# EAGLE board Stepper_2_0 (EAGLE 8.3.2)
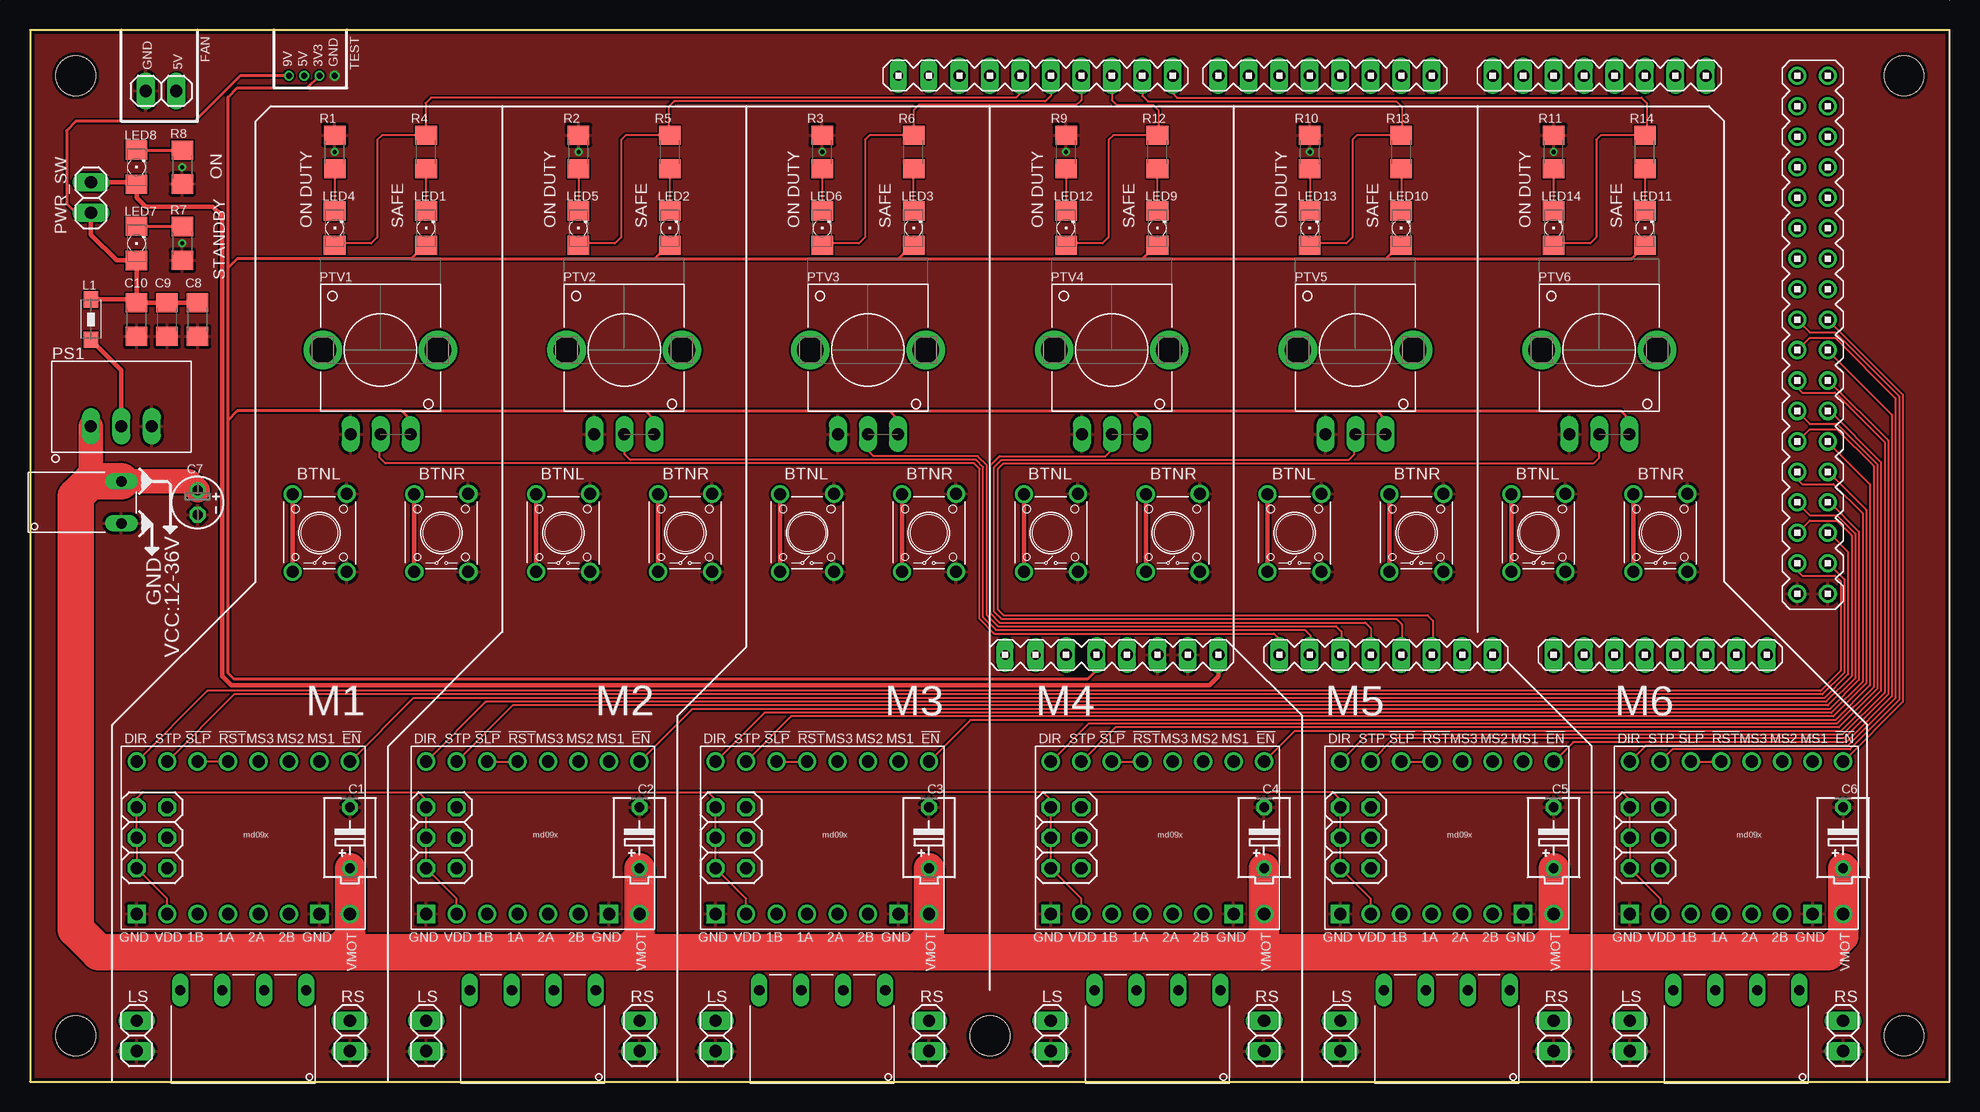
[diagram p0: board, top side]
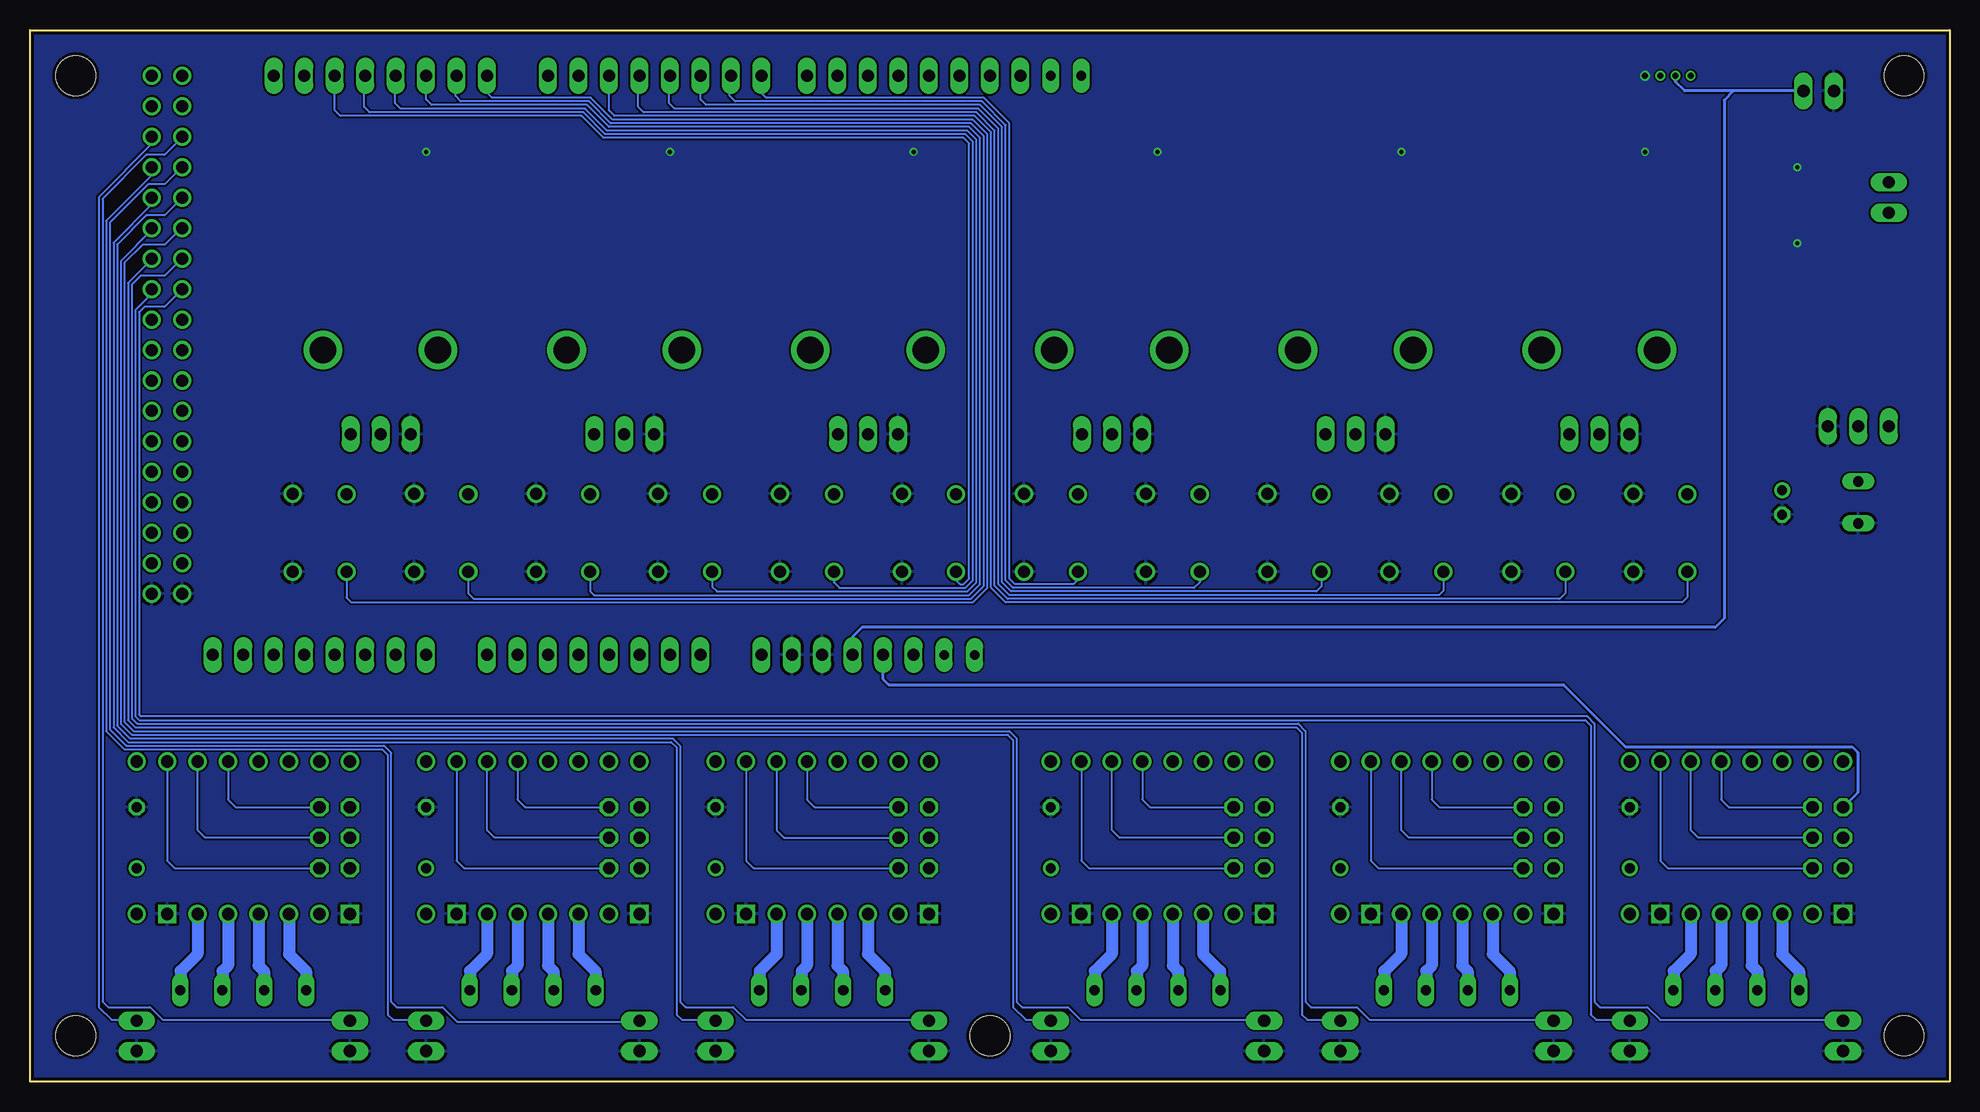
[diagram p1: board, bottom side, seen from below]

Size 160.02 x 87.63 mm. Coordinates in mm from the lower left corner, seen from the top.
Outline: 160.02,87.63 0,87.63 0,0 160.02,0 160.02,87.63
Copper layers (1*16): Top 0.035mm / dielectric 1.5mm / Bottom 0.035mm
Design rules "SeeedStudio_2layer_DRU_no_angle_20140221": minimum track width 6mil, minimum drill 12mil, track to track 6mil, track to pad 6mil, pad to pad 6mil, via to via 6mil, smd to smd 0mil, copper to edge 10mil, drill to drill 10mil, minimum pad ring 10mil, minimum via ring 6mil, stop-mask expansion 2mil, vias tented up to drill 100mil, thermal gap 10mil

## Footprints (pad centres in the part's own frame; a part is rotated, then mirrored left to right if it is on the bottom)
ETR2 = drill 0.813: + -2.54,0 | drill 0.813 octagon: - 2.54,0
E2-4 = drill 0.813 pad 1.27: + -1.016,0 | drill 0.813 pad 1.27 octagon: - 1.016,0
1206 = smd 1.6 x 1.8: 1 -1.4,0; 2 1.4,0
DUE(NOSPI) = drill 1 long: 2 -16.51,30.48; 3 -19.05,30.48; 3V3 -39.37,-17.78; 4 -21.59,30.48; 5 -24.13,30.48; 5V -36.83,-17.78; 6 -26.67,30.48; 7 -29.21,30.48; 8 -33.02,30.48; 9 -35.56,30.48; 10 -38.1,30.48; 11 -40.64,30.48; 12 -43.18,30.48; 13 -45.72,30.48; A0 -24.13,-17.78; A1 -21.59,-17.78; A2 -19.05,-17.78; A3 -16.51,-17.78; A4 -13.97,-17.78; A5 -11.43,-17.78; A6 -8.89,-17.78; A7 -6.35,-17.78; A8 -1.27,-17.78; A9 1.27,-17.78; A10 3.81,-17.78; A11 6.35,-17.78; AREF -50.8,30.48; CANRX 13.97,-17.78; CANTX 16.51,-17.78; DAC0 8.89,-17.78; DAC1 11.43,-17.78; GND1 -48.26,30.48; GND_1 -34.29,-17.78; GND_2 -31.75,-17.78; RESET -41.91,-17.78; RX0 -11.43,30.48; RX1 6.35,30.48; RX2 1.27,30.48; RX3 -3.81,30.48; SCL 11.43,30.48; SDA 8.89,30.48; TX0 -13.97,30.48; TX1 3.81,30.48; TX2 -1.27,30.48; TX3 -6.35,30.48; VIN -29.21,-17.78 | drill 1: 5V_A 19.05,30.48; 5V_B 21.59,30.48; 22 19.05,27.94; 23 21.59,27.94; 24 19.05,25.4; 25 21.59,25.4; 26 19.05,22.86; 27 21.59,22.86; 28 19.05,20.32; 29 21.59,20.32; 30 19.05,17.78; 31 21.59,17.78; 32 19.05,15.24; 33 21.59,15.24; 34 19.05,12.7; 35 21.59,12.7; 36 19.05,10.16; 37 21.59,10.16; 38 19.05,7.62; 39 21.59,7.62; 40 19.05,5.08; 41 21.59,5.08; 42 19.05,2.54; 43 21.59,2.54; 44 19.05,0; 45 21.59,0; 46 19.05,-2.54; 47 21.59,-2.54; 48 19.05,-5.08; 49 21.59,-5.08; 50 19.05,-7.62; 51 21.59,-7.62; 52 19.05,-10.16; 53 21.59,-10.16; GND_A 19.05,-12.7; GND_B 21.59,-12.7 | drill 0.8 pad 1.422 long: IOREF -44.45,-17.78; NC -46.99,-17.78; SCL1 -55.88,30.48; SDA1 -53.34,30.48
STAND-OFF = hole 3.302: 0,0
2X03 = drill 1.016 octagon: 1 -2.54,-1.27; 2 -2.54,1.27; 3 0,-1.27; 4 0,1.27; 5 2.54,-1.27; 6 2.54,1.27
1X02 = drill 1.016 long: 1 -1.27,0; 2 1.27,0
1206' = smd 1.35 x 1.2: 1 -1.675,0; 2 1.675,0
1206'' = smd 1.6 x 1.803: A -1.422,0; C 1.422,0
MD09X = drill 1.016: 1A 6.35,-1.27; 1B 6.35,-3.81; 2A 6.35,1.27; 2B 6.35,3.81; !EN -6.35,8.89; !RST -6.35,-1.27; !SLP -6.35,-3.81; DIR -6.35,-8.89; MS1 -6.35,6.35; MS2 -6.35,3.81; MS3 -6.35,1.27; STEP -6.35,-6.35; VDD 6.35,-6.35; VMOT 6.35,8.89 | drill 1.016 square: GND1 6.35,-8.89; GND2 6.35,6.35
VX78-500 = drill 1 long: P$1 -2.54,0; P$2 0,0; P$3 2.54,0
PTV09A-4 = drill 1 long: P$1 -2.5,-7; P$2 0,-7; P$3 2.5,-7 | drill 2.2: PA1 -4.8,0; PA2 4.8,0
BTN_SPST_6MM = drill 1: P$1 -3.25,2.25; P$2 3.23,2.25; P$3 -3.25,-2.25; P$4 3.25,-2.25
TB_HEAD_3.5MM_01X04 = drill 0.85 long: P$1 -5.25,0; P$2 -1.75,0; P$3 1.75,0; P$4 5.25,0
TB_HEAD_3.5MM_01X02 = drill 0.85 long: P$1 -1.75,0; P$2 1.75,0

## Placement (x,y rotation side)
C1  100u  [ETR2]  26.67,20.32 90 top
C2  100u  [ETR2]  50.8,20.32 90 top
C3  100u  [ETR2]  74.93,20.32 90 top
C4  100u  [ETR2]  102.87,20.32 90 top
C5  100u  [ETR2]  127,20.32 90 top
C6  100u  [ETR2]  151.13,20.32 90 top
C7  10u  [E2-4]  13.97,48.26 270 top
C8  10u  [1206]  13.97,63.5 90 top
C9  4.7u  [1206]  11.43,63.5 90 top
C10  0.1u  [1206]  8.89,63.5 90 top
DUE1  DUE(NOSPI)  [DUE(NOSPI)]  128.27,53.34 0 top
H1  STAND-OFF  [STAND-OFF]  80.01,3.81 180 top
H2  STAND-OFF  [STAND-OFF]  156.21,83.82 180 top
H3  STAND-OFF  [STAND-OFF]  156.21,3.81 180 top
H4  STAND-OFF  [STAND-OFF]  3.81,3.81 180 top
H5  STAND-OFF  [STAND-OFF]  3.81,83.82 180 top
JP1  [2X03]  10.16,20.32 270 top
JP2  [2X03]  34.29,20.32 270 top
JP3  [2X03]  58.42,20.32 270 top
JP4  [1X02]  8.89,3.81 270 top
JP5  [1X02]  26.67,3.81 270 top
JP6  [1X02]  33.02,3.81 270 top
JP7  [1X02]  50.8,3.81 270 top
JP8  [1X02]  57.15,3.81 270 top
JP9  [1X02]  74.93,3.81 270 top
JP10  [2X03]  86.36,20.32 270 top
JP11  [2X03]  110.49,20.32 270 top
JP12  [2X03]  134.62,20.32 270 top
JP13  [1X02]  85.09,3.81 270 top
JP14  [1X02]  102.87,3.81 270 top
JP15  [1X02]  109.22,3.81 270 top
JP16  [1X02]  127,3.81 270 top
JP17  [1X02]  133.35,3.81 270 top
JP18  [1X02]  151.13,3.81 270 top
JP19  [1X02]  5.08,73.66 90 top
JP20  [1X02]  10.92,82.55 0 top
L1  [1206']  5.08,63.5 90 top
LED1  GREEN  [1206'']  33.02,71.12 90 top
LED2  GREEN  [1206'']  53.34,71.12 90 top
LED3  GREEN  [1206'']  73.66,71.12 90 top
LED4  RED  [1206'']  25.4,71.12 90 top
LED5  RED  [1206'']  45.72,71.12 90 top
LED6  RED  [1206'']  66.04,71.12 90 top
LED7  GREEN  [1206'']  8.89,69.85 90 top
LED8  RED  [1206'']  8.89,76.2 90 top
LED9  GREEN  [1206'']  93.98,71.12 90 top
LED10  GREEN  [1206'']  114.3,71.12 90 top
LED11  GREEN  [1206'']  134.62,71.12 90 top
LED12  RED  [1206'']  86.36,71.12 90 top
LED13  RED  [1206'']  106.68,71.12 90 top
LED14  RED  [1206'']  127,71.12 90 top
PL1  A4988X  [MD09X]  17.78,20.32 270 top
PL2  A4988X  [MD09X]  41.91,20.32 270 top
PL3  A4988X  [MD09X]  66.04,20.32 270 top
PL4  A4988X  [MD09X]  93.98,20.32 270 top
PL5  A4988X  [MD09X]  118.11,20.32 270 top
PL6  A4988X  [MD09X]  142.24,20.32 270 top
PS1  VX78-500  [VX78-500]  7.62,54.61 0 top
PTV1  10K  [PTV09A-4]  29.21,60.96 0 top
PTV2  10K  [PTV09A-4]  49.53,60.96 0 top
PTV3  10K  [PTV09A-4]  69.85,60.96 0 top
PTV4  10K  [PTV09A-4]  90.17,60.96 0 top
PTV5  10K  [PTV09A-4]  110.49,60.96 0 top
PTV6  10K  [PTV09A-4]  130.81,60.96 0 top
R1  150  [1206]  25.4,77.47 90 top
R2  150  [1206]  45.72,77.47 90 top
R3  150  [1206]  66.04,77.47 90 top
R4  150  [1206]  33.02,77.47 90 top
R5  150  [1206]  53.34,77.47 90 top
R6  150  [1206]  73.66,77.47 90 top
R7  1K  [1206]  12.7,69.85 270 top
R8  1K  [1206]  12.7,76.2 270 top
R9  150  [1206]  86.36,77.47 90 top
R10  150  [1206]  106.68,77.47 90 top
R11  150  [1206]  127,77.47 90 top
R12  150  [1206]  93.98,77.47 90 top
R13  150  [1206]  114.3,77.47 90 top
R14  150  [1206]  134.62,77.47 90 top
S1  BTN_SPST_6MM  [BTN_SPST_6MM]  24.13,45.72 90 top
S2  BTN_SPST_6MM  [BTN_SPST_6MM]  34.29,45.72 90 top
S3  BTN_SPST_6MM  [BTN_SPST_6MM]  44.45,45.72 90 top
S4  BTN_SPST_6MM  [BTN_SPST_6MM]  54.61,45.72 90 top
S5  BTN_SPST_6MM  [BTN_SPST_6MM]  64.77,45.72 90 top
S6  BTN_SPST_6MM  [BTN_SPST_6MM]  74.93,45.72 90 top
S7  BTN_SPST_6MM  [BTN_SPST_6MM]  85.09,45.72 90 top
S8  BTN_SPST_6MM  [BTN_SPST_6MM]  95.25,45.72 90 top
S9  BTN_SPST_6MM  [BTN_SPST_6MM]  105.41,45.72 90 top
S10  BTN_SPST_6MM  [BTN_SPST_6MM]  115.57,45.72 90 top
S11  BTN_SPST_6MM  [BTN_SPST_6MM]  125.73,45.72 90 top
S12  BTN_SPST_6MM  [BTN_SPST_6MM]  135.89,45.72 90 top
TB1  TB_HEAD_3.5MM_01X04  [TB_HEAD_3.5MM_01X04]  17.78,7.62 180 top
TB2  TB_HEAD_3.5MM_01X04  [TB_HEAD_3.5MM_01X04]  41.91,7.62 180 top
TB3  TB_HEAD_3.5MM_01X04  [TB_HEAD_3.5MM_01X04]  66.04,7.62 180 top
TB4  TB_HEAD_3.5MM_01X04  [TB_HEAD_3.5MM_01X04]  93.98,7.62 180 top
TB5  TB_HEAD_3.5MM_01X04  [TB_HEAD_3.5MM_01X04]  118.11,7.62 180 top
TB6  TB_HEAD_3.5MM_01X04  [TB_HEAD_3.5MM_01X04]  142.24,7.62 180 top
TB7  TB_HEAD_3.5MM_01X02  [TB_HEAD_3.5MM_01X02]  7.62,48.26 90 top

## Library data of the parts
C1-C7 = rcl
C8-C10 = SparkFun-Passives
DUE1 = JoshParts
H1-H5 = SparkFun-Electromechanical
JP1-JP20 = pinhead
L1 = WE-CBF; MPN: 742792118; OC_FARNELL: 1800374; OC_NEWARK: 78R5648; PACKAGE: IND-1206; SUPPLIER: Wuerth Elektronik
LED1-LED14 = adafruit
PL1-PL6 PS1 PTV1-PTV6 S1-S12 TB1-TB7 = Steppers
R1-R14 = SparkFun-Resistors

## Nets
3V3: DUE1.3V3 JP1.1 JP1.3 JP1.5 JP2.1 JP2.3 JP2.5 JP3.1 JP3.3 JP3.5 JP10.1 JP10.3 JP10.5 JP11.1 JP11.3 JP11.5 JP12.1 JP12.3 JP12.5 LED1.A LED2.A LED3.A LED9.A LED10.A LED11.A PL1.VDD PL2.VDD PL3.VDD PL4.VDD PL5.VDD PL6.VDD PTV1.P$3 PTV2.P$3 PTV3.P$3 PTV4.P$3 PTV5.P$3 PTV6.P$3
5V: DUE1.5V JP20.2
9V: C8.2 C9.2 C10.2 JP19.1 L1.2 LED7.A
GND: C1.- C2.- C3.- C4.- C5.- C6.- C7.- C8.1 C9.1 C10.1 DUE1.GND_1 DUE1.GND_2 DUE1.GND_A DUE1.GND_B JP4.2 JP5.2 JP6.2 JP7.2 JP8.2 JP9.2 JP13.2 JP14.2 JP15.2 JP16.2 JP17.2 JP18.2 JP20.1 PL1.GND1 PL1.GND2 PL2.GND1 PL2.GND2 PL3.GND1 PL3.GND2 PL4.GND1 PL4.GND2 PL5.GND1 PL5.GND2 PL6.GND1 PL6.GND2 PS1.P$3 PTV1.P$1 PTV2.P$1 PTV3.P$1 PTV4.P$1 PTV5.P$1 PTV6.P$1 R1.2 R2.2 R3.2 R7.2 R8.2 R9.2 R10.2 R11.2 S1.P$3 S1.P$4 S2.P$3 S2.P$4 S3.P$3 S3.P$4 S4.P$3 S4.P$4 S5.P$3 S5.P$4 S6.P$3 S6.P$4 S7.P$3 S7.P$4 S8.P$3 S8.P$4 S9.P$3 S9.P$4 S10.P$3 S10.P$4 S11.P$3 S11.P$4 S12.P$3 S12.P$4 TB7.P$1
M1_BTNL: DUE1.2 S1.P$1 S1.P$2
M1_BTNR: DUE1.3 S2.P$1 S2.P$2
M1_DIR: DUE1.52 PL1.DIR
M1_EN: DUE1.51 PL1.!EN
M1_LED: DUE1.13 LED4.A R4.2
M1_MVEL: DUE1.A0 PTV1.P$2
M1_SL: DUE1.34 JP4.1
M1_SR: DUE1.35 JP5.1
M1_STEP: DUE1.53 PL1.STEP
M2_BTNL: DUE1.4 S3.P$1 S3.P$2
M2_BTNR: DUE1.5 S4.P$1 S4.P$2
M2_DIR: DUE1.50 PL2.DIR
M2_EN: DUE1.49 PL2.!EN
M2_LED: DUE1.12 LED5.A R5.2
M2_MVEL: DUE1.A1 PTV2.P$2
M2_SL: DUE1.32 JP6.1
M2_SR: DUE1.33 JP7.1
M2_STEP: DUE1.48 PL2.STEP
M3_BTNL: DUE1.6 S5.P$1 S5.P$2
M3_BTNR: DUE1.7 S6.P$1 S6.P$2
M3_DIR: DUE1.46 PL3.DIR
M3_EN: DUE1.45 PL3.!EN
M3_LED: DUE1.11 LED6.A R6.2
M3_MVEL: DUE1.A2 PTV3.P$2
M3_SL: DUE1.30 JP8.1
M3_SR: DUE1.31 JP9.1
M3_STEP: DUE1.47 PL3.STEP
M4_BTNL: DUE1.RX1 S7.P$1 S7.P$2
M4_BTNR: DUE1.TX1 S8.P$1 S8.P$2
M4_DIR: DUE1.44 PL4.DIR
M4_EN: DUE1.43 PL4.!EN
M4_LED: DUE1.10 LED12.A R12.2
M4_MVEL: DUE1.A3 PTV4.P$2
M4_SL: DUE1.28 JP13.1
M4_SR: DUE1.29 JP14.1
M4_STEP: DUE1.42 PL4.STEP
M5_BTNL: DUE1.RX2 S9.P$1 S9.P$2
M5_BTNR: DUE1.TX2 S10.P$1 S10.P$2
M5_DIR: DUE1.40 PL5.DIR
M5_EN: DUE1.39 PL5.!EN
M5_LED: DUE1.9 LED13.A R13.2
M5_MVEL: DUE1.A4 PTV5.P$2
M5_SL: DUE1.26 JP15.1
M5_SR: DUE1.27 JP16.1
M5_STEP: DUE1.41 PL5.STEP
M6_BTNL: DUE1.RX3 S11.P$1 S11.P$2
M6_BTNR: DUE1.TX3 S12.P$1 S12.P$2
M6_DIR: DUE1.38 PL6.DIR
M6_EN: DUE1.37 PL6.!EN
M6_LED: DUE1.8 LED14.A R14.2
M6_MVEL: DUE1.A5 PTV6.P$2
M6_SL: DUE1.24 JP17.1
M6_SR: DUE1.25 JP18.1
M6_STEP: DUE1.36 PL6.STEP
N$1: PL2.1B TB2.P$4
N$2: PL2.1A TB2.P$3
N$3: PL2.2A TB2.P$2
N$4: PL2.2B TB2.P$1
N$5: PL2.!RST PL2.!SLP
N$6: JP2.2 PL2.MS3
N$7: JP2.4 PL2.MS2
N$8: JP2.6 PL2.MS1
N$9: LED4.C R1.1
N$10: LED5.C R2.1
N$11: LED1.C R4.1
N$13: LED2.C R5.1
N$15: PL3.1B TB3.P$4
N$16: PL3.1A TB3.P$3
N$17: PL3.2A TB3.P$2
N$18: PL3.2B TB3.P$1
N$19: PL3.!RST PL3.!SLP
N$20: JP3.2 PL3.MS3
N$21: JP3.4 PL3.MS2
N$22: JP3.6 PL3.MS1
N$23: LED6.C R3.1
N$24: LED3.C R6.1
N$26: PL4.1B TB4.P$4
N$27: PL4.1A TB4.P$3
N$28: PL4.2A TB4.P$2
N$29: PL4.2B TB4.P$1
N$30: PL4.!RST PL4.!SLP
N$31: JP10.2 PL4.MS3
N$32: JP10.4 PL4.MS2
N$33: JP10.6 PL4.MS1
N$34: LED12.C R9.1
N$35: LED9.C R12.1
N$37: PL5.1B TB5.P$4
N$38: PL5.1A TB5.P$3
N$39: PL5.2A TB5.P$2
N$40: PL5.2B TB5.P$1
N$41: PL5.!RST PL5.!SLP
N$42: JP11.2 PL5.MS3
N$43: JP11.4 PL5.MS2
N$44: JP11.6 PL5.MS1
N$45: LED13.C R10.1
N$46: LED10.C R13.1
N$48: PL6.1B TB6.P$4
N$49: PL6.1A TB6.P$3
N$50: PL6.2A TB6.P$2
N$51: PL6.2B TB6.P$1
N$52: PL6.!RST PL6.!SLP
N$53: JP12.6 PL6.MS1
N$54: JP12.4 PL6.MS2
N$55: JP12.2 PL6.MS3
N$56: LED14.C R11.1
N$57: PL1.1B TB1.P$4
N$58: PL1.1A TB1.P$3
N$59: PL1.2A TB1.P$2
N$60: PL1.2B TB1.P$1
N$61: LED11.C R14.1
N$62: PL1.!RST PL1.!SLP
N$64: JP1.2 PL1.MS3
N$65: JP1.4 PL1.MS2
N$66: JP1.6 PL1.MS1
N$67: L1.1 PS1.P$2
N$68: LED7.C R7.1
N$71: LED8.C R8.1
VCC: C1.+ C2.+ C3.+ C4.+ C5.+ C6.+ C7.+ PL1.VMOT PL2.VMOT PL3.VMOT PL4.VMOT PL5.VMOT PL6.VMOT PS1.P$1 TB7.P$2
VIN: DUE1.VIN JP19.2 LED8.A

## Tracks (layer width: path | path; a pad name or v marks a point on that pad's centre or on a via)
3V3  (via drill 0.5)
  Top 0.152: PL1.VDD 11.43,15.24 JP1.5 JP1.3 JP1.1 8.89,23.62 9.4,24.13 32.38,24.13 | PL6.VDD 135.89,15.24 JP12.5 JP12.3 JP12.1 133.35,23.5 132.72,24.13 108.58,24.13 | PL5.VDD 111.76,15.24 JP11.5 JP11.3 JP11.1 109.22,23.5 108.58,24.13 | PL4.VDD 87.63,15.24 JP10.5 JP10.3 JP10.1 85.09,23.5 84.45,24.13 | PL3.VDD 59.69,15.24 JP3.5 JP3.3 JP3.1 57.15,23.5 56.52,24.13 | PL2.VDD 35.56,15.24 JP2.5 JP2.3 JP2.1 33.02,23.5 32.38,24.13 | 32.38,24.13 56.52,24.13 | 84.45,24.13 56.52,24.13 | 108.58,24.13 84.45,24.13
  Top 0.254: DUE1.3V3 88.9,34.29 88.14,33.53 17.02,33.53 16.51,34.04 16.51,55.12 | 16.51,55.12 17.27,55.88 30.99,55.88 | 91.95,55.88 112.27,55.88 | 71.63,55.88 91.95,55.88 | 51.31,55.88 71.63,55.88 | 30.99,55.88 51.31,55.88 | 112.27,55.88 132.59,55.88 133.35,55.12 133.35,54 PTV6.P$3 | PTV5.P$3 112.99,55.16 112.27,55.88 | PTV4.P$3 92.67,55.16 91.95,55.88 | PTV3.P$3 72.35,55.16 71.63,55.88 | PTV2.P$3 52.03,55.16 51.31,55.88 | PTV1.P$3 31.71,55.16 30.99,55.88 | 16.51,55.12 16.51,67.82 | 16.51,67.82 17.27,68.58 31.75,68.58 | 92.71,68.58 113.03,68.58 | 72.39,68.58 92.71,68.58 | 52.07,68.58 72.39,68.58 | 31.75,68.58 52.07,68.58 | 113.03,68.58 133.5,68.58 LED11.A | LED10.A 114.15,69.7 113.03,68.58 | LED9.A 93.83,69.7 92.71,68.58 | LED3.A 73.51,69.7 72.39,68.58 | LED2.A 53.19,69.7 52.07,68.58 | LED1.A 32.87,69.7 31.75,68.58 | 16.51,67.82 16.51,82.04 17.27,82.8 23.11,82.8 v24.13,83.82
  Bottom 0.254: DUE1.3V3 88.9,33.53 88.44,33.07 32.21,33.07 27.03,27.89 8.13,27.89 7.67,27.43 7.67,24.08 JP1.1
5V  (via drill 0.5)
  Bottom 0.254: JP20.2 18.03,82.55 | 18.03,82.55 18.8,81.79 18.8,38.61 19.56,37.85 90.68,37.85 91.44,37.08 DUE1.5V | 18.03,82.55 22.1,82.55 22.86,83.31 v22.86,83.82
9V  (via drill 0.5)
  Top 0.254: 8.73,65.06 8.62,65.17 | 8.73,65.06 C10.2 | 8.89,65.23 8.73,65.06 | 8.81,68.5 8.74,68.58 | JP19.1 3.81,72.39 3.05,73.15 3.05,79.25 3.81,80.01 13.72,80.01 17.53,83.82 v21.59,83.82
  Top 0.381: L1.2 8.62,65.17 C10.2 | C10.2 C9.2 C8.2 | C10.2 LED7.A | LED7.A 8.81,68.5 | LED7.A 7.21,68.43 5.08,70.56 JP19.1
GND  (via drill 0.35, 0.5)
  other vias: 66.04,77.47 86.36,77.47 106.68,77.47 127,77.47 45.72,77.47 25.4,77.47 25.4,83.82 12.7,76.2 12.7,69.85
  pour Top: 160.02,0 0,0 0,87.63 160.02,87.63
  pour Bottom: 160.02,0 0,0 0,87.63 160.02,87.63
M1_BTNL
  Top 0.381: S1.P$1 S1.P$2
  Bottom 0.152: S1.P$1 21.88,40.35 22.3,39.93 78.69,39.93 79.91,41.15 79.91,79.1 81.28,80.47 111.3,80.47 111.76,80.92 DUE1.2
M1_BTNR
  Top 0.381: S2.P$1 S2.P$2
  Bottom 0.152: S2.P$1 32.04,40.71 32.51,40.23 78.54,40.23 79.6,41.3 79.6,79.25 81.13,80.77 108.86,80.77 109.32,81.23 109.32,83.72 DUE1.3
M1_DIR
  Top 0.152: DUE1.52 147.32,42.57 147.73,42.16 150.47,42.16 150.93,41.71 150.93,34.24 149.25,32.56 14.78,32.56 PL1.DIR
M1_EN
  Top 0.152: DUE1.51 149.96,45.72 151.54,44.15 151.54,33.93 149.56,31.95 31.95,31.95 PL1.!EN
M1_LED
  Top 0.152: 32.97,78.87 R4.2 | 32.97,78.87 29.34,78.87 28.96,78.49 28.96,70.36 28.45,69.85 25.55,69.85 LED4.A | DUE1.13 82.55,82.35 82.19,81.99 33.43,81.99 32.97,81.53 32.97,78.87
M1_MVEL
  Top 0.152: DUE1.A0 104.14,36.88 103.68,37.34 80.37,37.34 79.15,38.56 79.15,51.05 78.69,51.51 29.62,51.51 29.16,51.97 29.16,53.91 PTV1.P$2
M1_SL
  Bottom 0.152: DUE1.34 148.79,64.57 150.47,64.57 150.93,64.11 150.93,30.58 150.77,30.43 30.23,30.43 29.62,29.82 29.62,6.66 29.16,6.2 25.2,6.2 24.13,5.13 8.94,5.13 JP4.1
M1_SR
  Bottom 0.152: DUE1.35 149.86,65.63 151.23,64.26 151.23,30.43 150.93,30.12 30.38,30.12 29.92,29.67 29.92,5.59 29.46,5.13 26.72,5.13 JP5.1
M1_STEP
  Top 0.152: DUE1.53 149.91,43.18 151.23,41.86 151.23,34.09 149.4,32.26 17.02,32.26 PL1.STEP
M2_BTNL
  Top 0.381: S3.P$1 S3.P$2
  Bottom 0.152: S3.P$1 42.2,40.91 42.57,40.54 78.38,40.54 79.3,41.45 79.3,79.4 80.97,81.08 106.27,81.08 106.73,81.53 106.73,83.77 DUE1.4
M2_BTNR
  Top 0.381: S4.P$1 S4.P$2
  Bottom 0.152: S4.P$1 52.36,41.26 52.78,40.84 78.23,40.84 78.99,41.6 78.99,79.55 80.82,81.38 103.68,81.38 104.14,81.84 DUE1.5
M2_DIR
  Top 0.152: DUE1.50 148.34,46.74 150.62,46.74 151.84,45.52 151.84,33.78 149.71,31.65 38,31.65 PL2.DIR
M2_EN
  Top 0.152: DUE1.49 150.01,48.26 152.45,45.82 152.45,33.48 150.01,31.04 55.17,31.04 PL2.!EN
M2_LED
  Top 0.152: LED5.A 45.87,69.85 48.77,69.85 49.28,70.36 49.28,78.49 49.66,78.87 R5.2 53.24,78.97 53.24,81.23 53.7,81.69 84.63,81.69 85.09,82.14 DUE1.12
M2_MVEL
  Top 0.152: DUE1.A1 106.73,35.61 106.73,37.19 106.27,37.64 80.52,37.64 79.45,38.71 79.45,51.21 78.84,51.82 50.04,51.82 49.58,52.27 49.58,53.91 PTV2.P$2
M2_SL
  Bottom 0.152: DUE1.32 147.37,68.58 148.79,67.16 150.77,67.16 151.54,66.4 151.54,30.28 151.08,29.82 54.3,29.82 53.7,29.21 53.7,6.66 53.24,6.2 49.43,6.2 48.36,5.13 33.07,5.13 JP6.1
M2_SR
  Bottom 0.152: DUE1.33 149.86,68.53 151.84,66.55 151.84,30.12 151.23,29.52 54.46,29.52 54,29.06 54,5.59 53.54,5.13 50.85,5.13 JP7.1
M2_STEP
  Top 0.152: DUE1.48 147.32,48.21 148.34,47.19 150.62,47.19 152.15,45.67 152.15,33.63 149.86,31.34 40.23,31.34 PL2.STEP
M3_BTNL
  Top 0.381: S5.P$2 S5.P$1
  Bottom 0.152: S5.P$1 62.52,41.62 62.99,41.15 78.08,41.15 78.69,41.76 78.69,79.7 80.67,81.69 101.24,81.69 101.7,82.14 101.7,83.72 DUE1.6
M3_BTNR
  Top 0.381: S6.P$2 S6.P$1
  Bottom 0.152: S6.P$1 72.68,41.82 73.05,41.45 77.93,41.45 78.38,41.91 78.38,79.86 80.52,81.99 98.65,81.99 99.11,82.45 99.11,83.77 DUE1.7
M3_DIR
  Top 0.152: DUE1.46 147.32,50.19 147.73,49.78 150.32,49.78 152.76,47.35 152.76,33.33 150.16,30.73 61.21,30.73 PL3.DIR
M3_EN
  Top 0.152: DUE1.45 149.86,53.29 153.37,49.78 153.37,33.02 150.47,30.12 78.38,30.12 PL3.!EN
M3_LED
  Top 0.152: LED6.A 66.19,69.85 69.09,69.85 69.6,70.36 69.6,78.49 69.98,78.87 R6.2 73.66,80.92 74.12,81.38 87.22,81.38 87.63,81.79 DUE1.11
M3_MVEL
  Top 0.152: DUE1.A2 109.32,35.66 109.32,37.49 108.86,37.95 80.67,37.95 79.76,38.86 79.76,51.36 78.99,52.12 70.31,52.12 69.85,52.58 PTV3.P$2
M3_SL
  Bottom 0.152: DUE1.30 147.42,71.12 148.79,69.75 150.62,69.75 152.15,68.22 152.15,29.97 151.38,29.21 78.38,29.21 77.78,28.6 77.78,6.66 77.32,6.2 73.51,6.2 72.44,5.13 57.2,5.13 JP8.1
M3_SR
  Bottom 0.152: DUE1.31 149.86,70.97 152.45,68.38 152.45,29.82 151.54,28.91 78.54,28.91 78.08,28.45 78.08,6.2 77.01,5.13 74.98,5.13 JP9.1
M3_STEP
  Top 0.152: DUE1.47 149.91,50.8 153.06,47.65 153.06,33.17 150.32,30.43 63.45,30.43 PL3.STEP
M4_BTNL
  Top 0.381: S7.P$2 S7.P$1
  Bottom 0.152: S7.P$1 82.84,41.79 82.5,41.45 82.19,41.45 81.74,41.91 81.74,78.18 82.19,78.64 112.22,78.64 114.05,80.47 134.16,80.47 134.62,80.92 DUE1.RX1
M4_BTNR
  Top 0.381: S8.P$2 S8.P$1
  Bottom 0.152: S8.P$1 93,41.59 92.56,41.15 82.04,41.15 81.43,41.76 81.43,78.33 82.04,78.94 112.06,78.94 113.89,80.77 131.72,80.77 132.18,81.23 132.18,83.72 DUE1.TX1
M4_DIR
  Top 0.152: DUE1.44 148.34,54.36 150.62,54.36 153.67,51.31 153.67,32.87 150.62,29.82 88.24,29.82 PL4.DIR
M4_EN
  Top 0.152: DUE1.43 150.01,55.88 154.28,51.61 154.28,32.56 150.93,29.21 105.41,29.21 PL4.!EN
M4_LED
  Top 0.152: LED12.A 86.51,69.85 89.41,69.85 89.92,70.36 89.92,78.49 90.3,78.87 R12.2 94.08,78.97 94.08,80.92 93.62,81.38 90.58,81.38 90.17,81.79 DUE1.10
M4_MVEL
  Top 0.152: DUE1.A3 111.76,37.8 111.3,38.25 80.82,38.25 80.06,39.01 80.06,51.36 80.82,52.12 89.66,52.12 90.12,52.58 90.12,53.91 PTV4.P$2
M4_SL
  Bottom 0.152: DUE1.28 148.79,72.19 150.32,72.19 152.76,69.75 152.76,29.67 151.69,28.6 106.43,28.6 106.43,28.57 105.82,27.96 105.82,6.66 105.36,6.2 101.4,6.2 100.33,5.13 85.14,5.13 JP13.1
M4_SR
  Bottom 0.152: DUE1.29 149.86,73.1 153.06,69.9 153.06,29.52 151.84,28.3 106.58,28.3 106.12,27.84 106.12,5.59 105.66,5.13 102.92,5.13 JP14.1
M4_STEP
  Top 0.152: DUE1.42 147.32,55.83 148.34,54.81 150.62,54.81 153.97,51.46 153.97,32.72 150.77,29.52 90.47,29.52 PL4.STEP
M5_BTNL
  Top 0.381: S9.P$2 S9.P$1
  Bottom 0.152: S9.P$1 103.16,41.23 102.77,40.84 81.89,40.84 81.13,41.6 81.13,78.49 81.89,79.25 111.91,79.25 113.74,81.08 129.13,81.08 129.59,81.53 129.59,83.77 DUE1.RX2
M5_BTNR
  Top 0.381: S10.P$2 S10.P$1
  Bottom 0.152: S10.P$1 113.32,40.88 112.98,40.54 81.74,40.54 80.82,41.45 80.82,78.64 81.74,79.55 111.76,79.55 113.59,81.38 126.54,81.38 127,81.84 DUE1.TX2
M5_DIR
  Top 0.152: DUE1.40 147.32,57.81 147.73,57.4 150.47,57.4 154.58,53.29 154.58,32.41 151.08,28.91 111.45,28.91 PL5.DIR
M5_EN
  Top 0.152: DUE1.39 149.86,60.91 155.19,55.58 155.19,32.11 151.38,28.3 128.63,28.3 PL5.!EN
M5_LED
  Top 0.152: 114.2,78.87 R13.2 | 114.2,78.87 110.62,78.87 110.24,78.49 110.24,70.36 109.73,69.85 106.83,69.85 LED13.A | DUE1.9 92.71,82.14 93.17,81.69 113.89,81.69 114.35,81.23 114.35,79.02 114.2,78.87
M5_MVEL
  Top 0.152: DUE1.A4 114.35,35.61 114.35,38.1 113.89,38.56 80.97,38.56 80.37,39.17 80.37,51.21 80.97,51.82 109.93,51.82 110.39,52.27 110.39,53.86 PTV5.P$2
M5_SL
  Bottom 0.152: DUE1.26 147.37,76.2 148.79,74.78 150.16,74.78 153.37,71.58 153.37,29.36 151.99,27.99 130.5,27.99 129.9,27.38 129.9,6.66 129.44,6.2 125.63,6.2 124.41,4.98 109.32,4.98 JP15.1
M5_SR
  Bottom 0.152: DUE1.27 149.86,75.54 153.67,71.73 153.67,29.21 152.15,27.69 130.66,27.69 130.2,27.23 130.2,5.59 129.74,5.13 127.05,5.13 JP16.1
M5_STEP
  Top 0.152: DUE1.41 149.91,58.42 154.89,53.44 154.89,32.26 151.23,28.6 113.69,28.6 PL5.STEP
M6_BTNL
  Top 0.381: S11.P$2 S11.P$1
  Bottom 0.152: S11.P$1 123.48,40.68 123.04,40.23 81.58,40.23 80.52,41.3 80.52,78.79 81.58,79.86 111.61,79.86 113.44,81.69 124.1,81.69 124.56,82.14 124.56,83.72 DUE1.RX3
M6_BTNR
  Top 0.381: S12.P$2 S12.P$1
  Bottom 0.152: S12.P$1 133.64,40.32 133.25,39.93 81.43,39.93 80.21,41.15 80.21,78.94 81.43,80.16 111.45,80.16 113.28,81.99 121.51,81.99 121.97,82.45 121.97,83.77 DUE1.TX3
M6_DIR
  Top 0.152: DUE1.38 148.34,61.98 150.47,61.98 155.5,56.95 155.5,31.95 151.54,27.99 134.67,27.99 PL6.DIR
M6_EN
  Top 0.152: DUE1.37 156.11,57.25 156.11,31.65 PL6.!EN
M6_LED
  Top 0.152: LED14.A 127.15,69.85 130.05,69.85 130.56,70.36 130.56,78.49 130.94,78.87 R14.2 134.77,79.02 134.77,81.53 134.31,81.99 95.61,81.99 95.25,82.35 DUE1.8
M6_MVEL
  Top 0.152: DUE1.A5 116.94,35.66 116.94,38.41 116.48,38.86 81.13,38.86 80.67,39.32 80.67,51.05 81.13,51.51 130.35,51.51 130.81,51.97 PTV6.P$2
M6_SL
  Bottom 0.152: DUE1.24 147.32,78.69 148.79,77.22 150.32,77.22 153.97,73.56 153.97,6.66 153.52,6.2 150.01,6.2 148.95,5.13 133.4,5.13 JP17.1
M6_SR
  Bottom 0.152: DUE1.25 149.86,78.13 154.28,73.71 154.28,6.2 153.21,5.13 151.18,5.13 JP18.1
M6_STEP
  Top 0.152: DUE1.36 147.32,63.45 148.34,62.43 150.47,62.43 155.8,57.1 155.8,31.8 151.69,27.69 136.91,27.69 PL6.STEP
N$1
  Bottom 1.016: PL2.1B 38.1,10.63 36.68,9.21 36.68,7.64 TB2.P$4
N$2
  Bottom 1.016: PL2.1A 40.64,9.67 40.18,9.21 40.18,7.64 TB2.P$3
N$3
  Bottom 1.016: PL2.2A 43.18,9.67 43.64,9.21 43.64,7.64 TB2.P$2
N$4
  Bottom 1.016: PL2.2B 45.72,10.63 47.14,9.21 47.14,7.64 TB2.P$1
N$5
  Top 0.152: PL2.!SLP PL2.!RST
N$6
  Bottom 0.152: PL2.MS3 43.18,23.5 42.55,22.86 JP2.2
N$7
  Bottom 0.152: JP2.4 45.09,20.32 45.72,20.95 PL2.MS2
N$8
  Bottom 0.152: PL2.MS1 48.26,18.41 47.62,17.78 JP2.6
N$9
  Top 0.152: R1.1 LED4.C
N$10
  Top 0.152: R2.1 LED5.C
N$11
  Top 0.152: LED1.C R4.1
N$13
  Top 0.152: LED2.C R5.1
N$15
  Bottom 1.016: PL3.1B 62.23,10.63 60.81,9.21 60.81,7.64 TB3.P$4
N$16
  Bottom 1.016: PL3.1A 64.77,9.67 64.31,9.21 64.31,7.64 TB3.P$3
N$17
  Bottom 1.016: PL3.2A 67.31,9.67 67.77,9.21 67.77,7.64 TB3.P$2
N$18
  Bottom 1.016: PL3.2B 69.85,10.63 71.27,9.21 71.27,7.64 TB3.P$1
N$19
  Top 0.152: PL3.!SLP PL3.!RST
N$20
  Bottom 0.152: PL3.MS3 67.31,23.5 66.67,22.86 JP3.2
N$21
  Bottom 0.152: JP3.4 69.22,20.32 69.85,20.95 PL3.MS2
N$22
  Bottom 0.152: PL3.MS1 72.39,18.41 71.75,17.78 JP3.6
N$23
  Top 0.152: R3.1 LED6.C
N$24
  Top 0.152: LED3.C R6.1
N$26
  Bottom 1.016: PL4.1B 90.17,10.63 88.75,9.21 88.75,7.64 TB4.P$4
N$27
  Bottom 1.016: PL4.1A 92.71,9.67 92.25,9.21 92.25,7.64 TB4.P$3
N$28
  Bottom 1.016: PL4.2A 95.25,9.67 95.71,9.21 95.71,7.64 TB4.P$2
N$29
  Bottom 1.016: PL4.2B 97.79,10.63 99.21,9.21 99.21,7.64 TB4.P$1
N$30
  Top 0.152: PL4.!SLP PL4.!RST
N$31
  Bottom 0.152: PL4.MS3 95.25,23.5 94.61,22.86 JP10.2
N$32
  Bottom 0.152: PL4.MS2 97.79,20.95 97.16,20.32 JP10.4
N$33
  Bottom 0.152: PL4.MS1 100.33,18.41 99.69,17.78 JP10.6
N$34
  Top 0.152: R9.1 LED12.C
N$35
  Top 0.152: LED9.C R12.1
N$37
  Bottom 1.016: PL5.1B 114.3,10.63 112.89,9.21 112.89,7.64 TB5.P$4
N$38
  Bottom 1.016: PL5.1A 116.84,9.67 116.39,9.21 116.39,7.64 TB5.P$3
N$39
  Bottom 1.016: PL5.2A 119.38,9.67 119.83,9.21 119.83,7.64 TB5.P$2
N$40
  Bottom 1.016: PL5.2B 121.92,10.63 123.33,9.21 123.33,7.64 TB5.P$1
N$41
  Top 0.152: PL5.!SLP PL5.!RST
N$42
  Bottom 0.152: PL5.MS3 119.38,23.5 118.75,22.86 JP11.2
N$43
  Bottom 0.152: JP11.4 121.28,20.32 121.92,20.95 PL5.MS2
N$44
  Bottom 0.152: PL5.MS1 124.46,18.41 123.83,17.78 JP11.6
N$45
  Top 0.152: R10.1 LED13.C
N$46
  Top 0.152: R13.1 LED10.C
N$48
  Bottom 1.016: PL6.1B 138.43,10.63 137.01,9.21 137.01,7.64 TB6.P$4
N$49
  Bottom 1.016: PL6.1A 140.97,9.67 140.51,9.21 140.51,7.64 TB6.P$3
N$50
  Bottom 1.016: PL6.2A 143.51,9.67 143.97,9.21 143.97,7.64 TB6.P$2
N$51
  Bottom 1.016: PL6.2B 146.05,10.63 147.47,9.21 147.47,7.64 TB6.P$1
N$52
  Top 0.152: PL6.!SLP PL6.!RST
N$53
  Bottom 0.152: PL6.MS1 148.59,18.41 147.96,17.78 JP12.6
N$54
  Bottom 0.152: JP12.4 145.41,20.32 146.05,20.95 PL6.MS2
N$55
  Bottom 0.152: PL6.MS3 143.51,23.5 142.88,22.86 JP12.2
N$56
  Top 0.152: LED14.C R11.1
N$57
  Bottom 1.016: PL1.1B 13.97,10.63 12.55,9.21 12.55,7.64 TB1.P$4
N$58
  Bottom 1.016: PL1.1A 16.51,9.67 16.05,9.21 16.05,7.64 TB1.P$3
N$59
  Bottom 1.016: PL1.2A 19.05,9.67 19.51,9.21 19.51,7.64 TB1.P$2
N$60
  Bottom 1.016: PL1.2B 21.59,10.63 23.01,9.21 23.01,7.64 TB1.P$1
N$61
  Top 0.152: R14.1 LED11.C
N$62
  Top 0.152: PL1.!RST PL1.!SLP
N$64
  Bottom 0.152: PL1.MS3 19.05,23.5 18.41,22.86 JP1.2
N$65
  Bottom 0.152: JP1.4 20.95,20.32 21.59,20.95 PL1.MS2
N$66
  Bottom 0.152: PL1.MS1 24.13,18.41 23.5,17.78 JP1.6
N$67
  Top 0.381: PS1.P$2 7.62,59.28 L1.1
N$68
  Top 0.254: LED7.C 12.68,71.27 R7.1
N$71
  Top 0.254: LED8.C 12.68,77.62 R8.1
VCC
  Top 2.032: TB7.P$2 13.24,50.01 C7.+ | PS1.P$1 5.08,50.04
  Top 2.54: 25.4,10.79 26.67,12.06 PL1.VMOT C1.+ | C6.+ PL6.VMOT 151.13,12.06 149.86,10.79 | C5.+ PL5.VMOT 127,12.06 125.73,10.79 | C4.+ PL4.VMOT 102.87,12.06 101.6,10.79 | C3.+ PL3.VMOT 74.93,12.06 73.66,10.79 | C2.+ PL2.VMOT 50.8,12.06 49.53,10.79
  Top 3.048: 149.86,10.79 125.73,10.79 101.6,10.79 73.66,10.79 49.53,10.79 25.4,10.79 5.71,10.79 3.81,12.7 3.81,48.77 5.08,50.04 7.59,50.04 TB7.P$2
VIN
  Top 0.381: JP19.2 8.74,74.93 LED8.A 8.89,73.66 9.65,72.9 15.24,72.9 16,72.14 16,33.78 16.76,33.02 98.3,33.02 99.06,33.78 DUE1.VIN

## Text on the board
tPlace: FAN | TEST | 9V | 5V | 3V3 | GND | GND | 5V | ON | PWR_SW | ON DUTY | SAFE | ON DUTY | SAFE | ON DUTY | SAFE | ON DUTY | SAFE | ON DUTY | SAFE | ON DUTY | SAFE | STANDBY | BTNL | BTNR | BTNL | BTNR | BTNL | BTNR | BTNL | BTNR | BTNL | BTNR | BTNL | BTNR | VCC:12-36V | GND | M1 | M2 | M3 | M4 | M5 | M6 | LS | RS | LS | RS | LS | RS | LS | RS | LS | RS | LS | RS